# Allegro board METO_STM_CRY_V0_26.brd
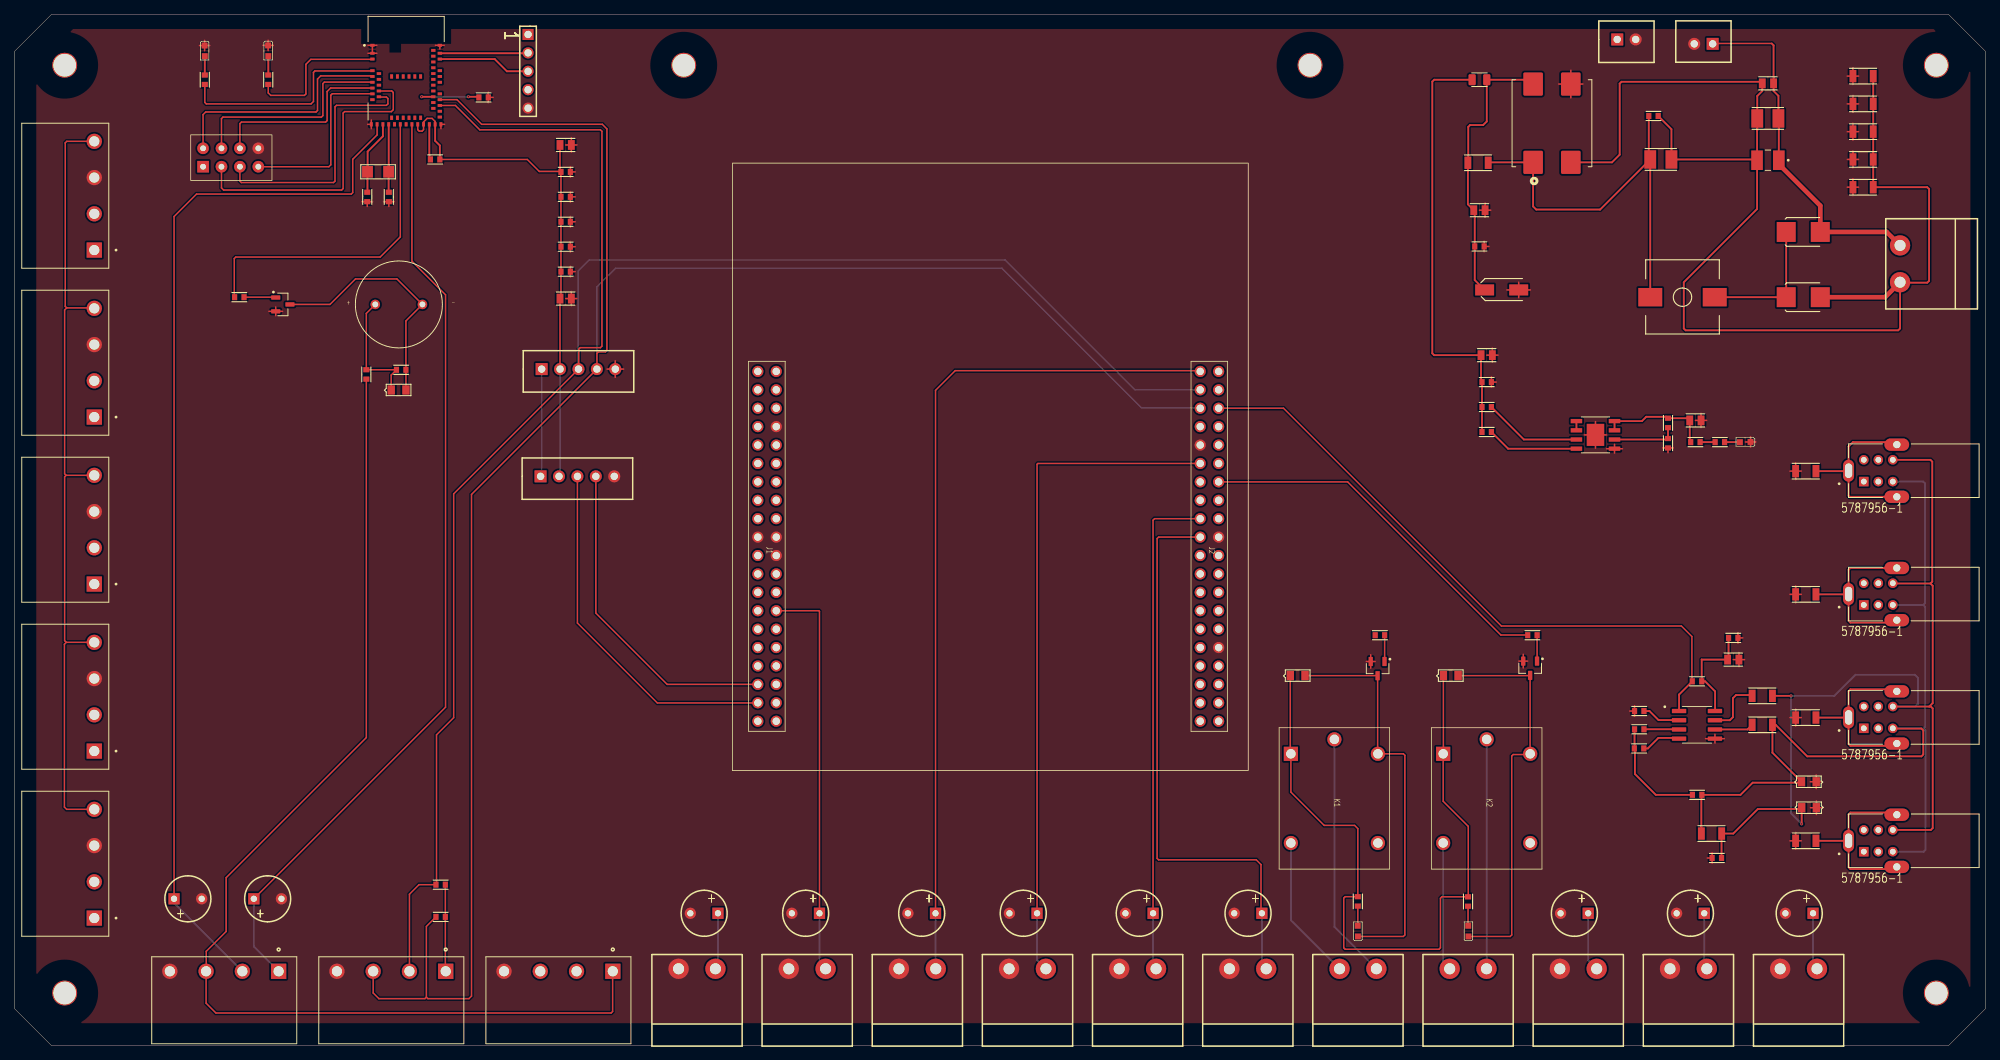
[diagram p0: board, top side]
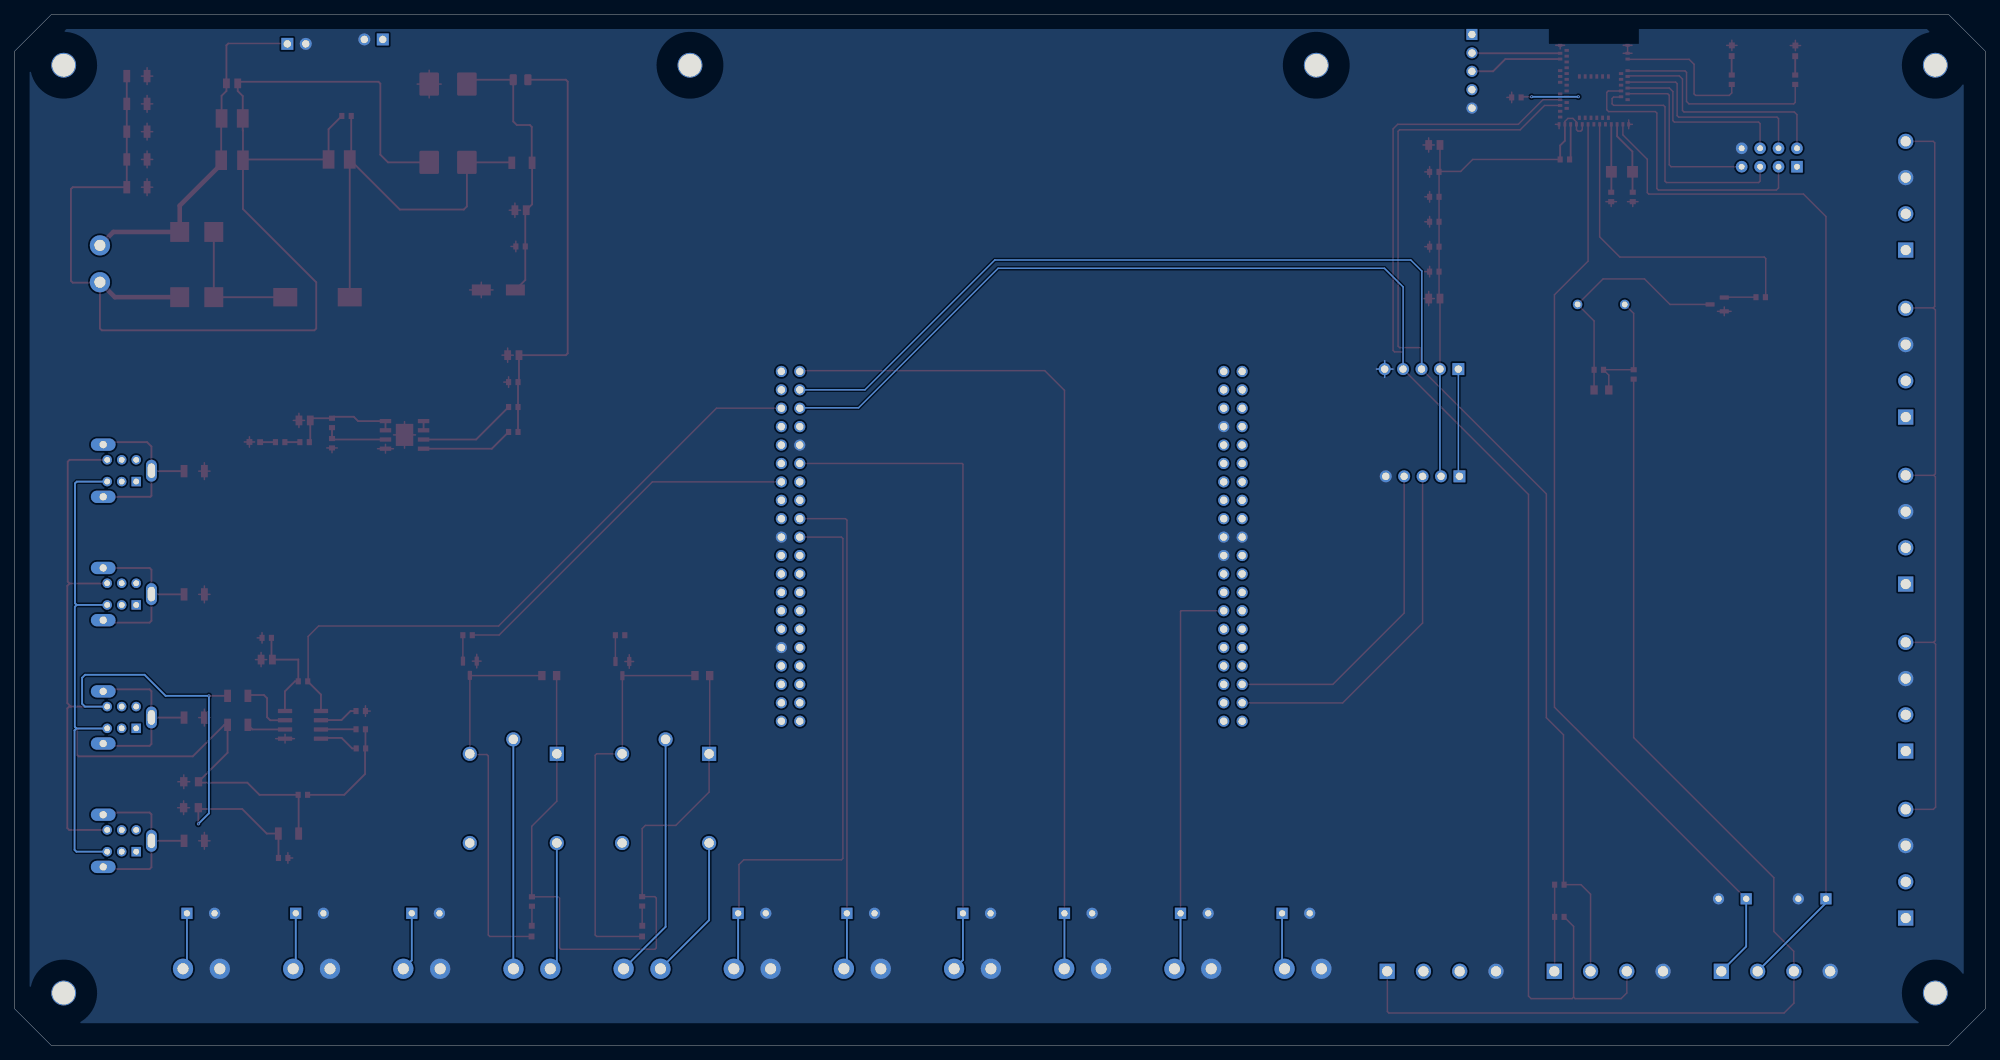
[diagram p1: board, bottom side, seen from below]

Outline 271.78 x 142.24 mm; copper layers: TOP, BOTTOM. Coordinates in mm from the lower left corner of the outline.
Outline path: 0,137.16 0,5.08 5.08,0 266.7,0 271.78,5.08 271.78,137.16 266.7,142.24 5.08,142.24 0,137.16

## Design rules (mm)
constraint set DEFAULT: min track width 0.203

## Placement (name value [footprint] x y rotation side)
C1  CAP POL  [CAPPOL2D250LS150034]  172 18.24 180 top
C2  CAP POL  [CAPPOL2D250LS150034]  217 18.24 180 top
C3  CAP POL  [CAPPOL2D250LS150034]  157 18.24 180 top
C4  CAP POL  [CAPPOL2D250LS150034]  141 18.24 180 top
C5  CAP POL  [CAPPOL2D250LS150034]  127 18.24 180 top
C6  CAP POL  [CAPPOL2D250LS150034]  111 18.24 180 top
C7  CAP POL  [CAPPOL2D250LS150034]  33 20.24 0 top
C8  CAP POL  [CAPPOL2D250LS150034]  97 18.24 180 top
C9  CAP POL  [CAPPOL2D250LS150034]  22 20.24 0 top
C10  CAP POL  [CAPPOL2D250LS150034]  233 18.24 180 top
C11  CAP POL  [CAPPOL2D250LS150034]  248 18.24 180 top
C12  10u/6V3/CER  [SMC0805]  237 53.24 0 top
C13  100n  [SMC0603]  237 56.24 0 top
C14  10u/6V3/CER  [SMC0805]  76 124.24 0 top
C15  100n  [SMC0603]  76 120.53 0 top
C16  100n  [SMC0603]  76 117.08 0 top
C17  100n  [SMC0603]  76 113.64 0 top
C18  100n  [SMC0603]  76 110.2 0 top
C19  100n  [SMC0603]  76 106.76 0 top
C20  10u/6V3/CER  [SMC0805]  76 103.05 0 top
C21  100n  [SMC0603]  64.68 130.8 0 top
C22  18p  [SMC0603]  48.64 117.07 90 top
C23  18p  [SMC0603]  51.61 117.07 90 top
C24  100n  [SMC0603]  202 110.24 0 top
C25  22uF/25V/LowESL  [SMC1210]  227 122.24 0 top
C26  100n  [SMC0603]  226 128.24 0 top
C27  10u/6V3/CER  [SMC0805]  202 115.24 0 top
C28  10u/6V3/CER  [SMC0805]  203 95.24 0 top
C29  100n  [SMC0603]  203 91.53 0 top
C30  10u/6V3/CER  [SMC0805]  231.78 86.24 0 top
C31  22uF/25VDV/Tantal  [CAP_6TPB33M]  241.78 122.14 180 top
C32  22uF/25V/LowESL  [SMC1210]  241.78 127.9 180 top
C33  10u/25V/CER  [SMC0805]  241.78 132.74 180 top
D1  1N4148WX  [SMDSOD323SD05T]  177.95 51.03 0 top
D2  1N4148WX  [SMDSOD323SD05T]  199.06 51.03 0 top
D3  SD12C  [SMDSOD323PESD5V]  248.44 36.39 0 top
D4  SD12C  [SMDSOD323PESD5V]  246.43 32.81 180 top
D5  1N4148WX  [SMDSOD323SD05T]  53.98 90.44 0 top
D6  LED-BLUE  [LED_0603]  35 137.24 90 top
D7  LED-RED  [LED_0603]  26.24 137.23 90 top
D8  MBRA340T3  [SMDO214AA21]  249 112.24 0 top
D9  MBRA340T3  [SMDO214AA21]  249 103.24 0 top
D10  SMAJ7A  [SMDO214AA21SMAJ33A]  205 104.24 0 top
D11  LED-GREEN  [LED_0603]  238.65 83.24 0 top
D12  LED-BLUE  [LED_0603]  185.22 15.78 270 top
D13  LED-BLUE  [LED_0603]  200.46 15.78 270 top
F1  0ZCK0100FF2E  [FUSC2113X180N]  202 133.24 180 top
FB1  MPZ1608S601A  [SMR0603]  231.78 83.24 0 top
FL1  ACM1211-102-2PL-TL01  [FIL_ACM1211-102-2PL-TL01]  212 127.24 90 top
J1  FH_2x20SG  [FH2X20SG]  102.5 93 270 top
J2  FH_2x20SG  [FH2X20SG]  163.5 93 270 top
J3  CON2  [2LI_KLEMENS_200MILS]  155.46 10.58 180 top
J4  CON2  [2LI_KLEMENS_200MILS]  170.64 10.58 180 top
J5  282811-4  [TE_282811-4]  11 117.24 90 top
J6  CON2  [2LI_KLEMENS_200MILS]  185.83 10.58 180 top
J7  CON2  [2LI_KLEMENS_200MILS]  201.02 10.58 180 top
J8  282811-4  [TE_282811-4]  11 94.2 90 top
J9  CON2  [2LI_KLEMENS_200MILS]  140.27 10.58 180 top
J10  282811-4  [TE_282811-4]  11 71.16 90 top
J11  282811-4  [TE_282811-4]  51.96 10.24 180 top
J12  CON2  [2LI_KLEMENS_200MILS]  125.08 10.58 180 top
J13  282811-4  [TE_282811-4]  11 48.12 90 top
J14  282811-4  [TE_282811-4]  75 10.24 180 top
J15  CON2  [2LI_KLEMENS_200MILS]  109.89 10.58 180 top
J16  282811-4  [TE_282811-4]  11 25.08 90 top
J17  CON2  [2LI_KLEMENS_200MILS]  94.7 10.58 180 top
J18  CON2  [2LI_KLEMENS_200MILS]  79.51 10.58 180 top
J19  CON2  [2LI_KLEMENS_200MILS]  260 93.24 270 top
J20  282811-4  [TE_282811-4]  28.92 10.24 180 top
J21  CON2  [2LI_KLEMENS_200MILS]  216.21 10.58 180 top
J22  CON2  [2LI_KLEMENS_200MILS]  231.4 10.58 180 top
J23  5787956-1  [TE_5787956-1]  257 79.3 0 top
J24  CON5  [CON5X140PROG]  70.82 139.49 270 top
J25  5787956-1  [TE_5787956-1]  257 62.28 0 top
J26  5787956-1  [TE_5787956-1]  257 45.26 0 top
J27  5787956-1  [TE_5787956-1]  257 28.24 0 top
J28  CON8  [HEADER_2_54MM_2X4]  26 121.24 0 top
J29  CON5  [CON5X140]  72.69 93.32 0 top
J30  CON5  [CON5X140]  72.54 78.52 0 top
J31  CON2  [CON2X140]  234.16 138.19 180 top
J32  CON2  [CON2X140]  221 138.8 0 top
K1  JQC-3F-_T73_-1Z-12VDC  [JQC3FT731Z12VDC]  176 40.24 270 top
K2  JQC-3F-_T73_-1Z-12VDC  [JQC3FT731Z12VDC]  197 40.24 270 top
L1  10uH  [SML0603]  58 122.24 0 top
L2  10u/SLF10145  [SLF10145NEW]  230 103.24 0 top
LS1  CCG-1206  [CUI_CCG-1206]  53 102.24 0 top
NOREF  -  [unnamed]  6.92 135.24 0 top
NOREF#2  -  [#2]  197 40.24 90 top
NOREF#3  -  [#2]  209 40.24 90 top
NOREF#4  -  [#2]  197 40.24 0 top
NOREF#5  -  [unnamed]  92.28 135.24 0 top
NOREF#6  -  [#2]  102.5 44.74 0 top
NOREF#7  -  [#2]  209 27.94 90 top
NOREF#8  -  [#2]  176 40.24 0 top
NOREF#9  -  [unnamed]  265 7.24 0 top
NOREF#10  -  [#2]  188 27.94 90 top
NOREF#11  -  [#2]  176 27.94 0 top
NOREF#12  -  [#2]  176 40.24 90 top
NOREF#13  -  [unnamed]  265 135.24 0 top
NOREF#14  -  [#2]  197 27.94 0 top
NOREF#15  -  [#2]  188 40.24 90 top
NOREF#16  -  [unnamed]  178.64 135.24 0 top
NOREF#17  -  [unnamed]  6.92 7.24 0 top
Q1  BC817  [SOT95P230X110-3N]  187.96 52 270 top
Q2  BC817  [SOT95P230X110-3N]  208.99 52.05 270 top
Q3  BC817  [SOT95P230X110-3N]  37 102.24 0 top
R1  1K  [SMR0603]  188.28 56.61 0 top
R2  1K  [SMR0603]  209.31 56.61 0 top
R3  10k  [SMR0603]  232.02 34.58 0 top
R4  10k  [SMR0603]  224.01 40.98 0 top
R5  10k  [SMR0603]  224.04 43.63 0 top
R6  10k  [SMR0603]  232 50.24 180 top
R7  10k  [SMR0603]  224.04 46.14 0 top
R8  100R  [SMR1206]  241 44.24 180 top
R9  120R  [SMR1206]  234 29.24 0 top
R10  100R  [SMR1206]  241 48.24 180 top
R11  100R  [SMR1206]  247 79.24 0 top
R12  10k  [SMR0603]  234.73 25.87 180 top
R13  33R  [SMR0603]  48.51 92.58 270 top
R14  1K  [SMR0603]  53.32 93.22 180 top
R15  180R  [SMR0603]  31 103.24 0 top
R16  470R  [SMR0603]  34.99 133.24 90 top
R17  470R  [SMR0603]  26.24 133.24 90 top
R18  OR  [SMR1206]  201.81 121.78 180 top
R19  0R  [SMR1206]  254.9 118.41 180 top
R20  0R  [SMR1206]  254.9 122.24 180 top
R21  0R  [SMR1206]  254.9 126.08 180 top
R22  0R  [SMR1206]  254.9 129.91 180 top
R23  0R  [SMR1206]  254.9 133.74 180 top
R24  100k  [SMR0603]  203 88.08 0 top
R25  6k8  [SMR0603]  228 85.89 270 top
R26  100k  [SMR0603]  203 84.64 0 top
R27  470R  [SMR0603]  235.15 83.24 0 top
R28  2k2  [SMR0603]  228 83.09 270 top
R29  100R  [SMR1206]  247 62.24 0 top
R30  100R  [SMR1206]  247 45.24 0 top
R31  100R  [SMR1206]  247 28.24 0 top
R32  470R  [SMR0603]  185.23 19.88 270 top
R33  470R  [SMR0603]  200.43 19.87 270 top
R34  1K5  [SMR0603]  58.76 17.74 180 top
R35  1K5  [SMR0603]  58.76 22.19 180 top
U1  MAX485ESA+  [SOIC127P600X175-8N]  232 44.24 0 top
U2  MDBT50Q-1MV2  [XCVR_MDBT50Q-1MV2]  54 134.24 0 top
U3  AP7165-SPG-13  [SOIC127P600X163-9N]  218 84.24 0 top
Y1  CM315D32768DZFT  [XTAL_CM315_SMD]  50.13 120.54 180 top

## Library data of the parts
C1-C11 = CAP POL
C12-C23 C28-C30 = CAPACITOR NON-POL
C24-C27 = CAPACITOR NON-POL: room: Vdd5V
C31 = 6TPB33M: room: PowerIn
C32 C33 = CAPACITOR NON-POL: room: PowerIn
D1 D2 D5 = DIODE ZENER: room: Buzzer
D3 D4 = DIODE TVS BI-DIR: room: rs232
D6 D7 D11-D13 = LED
D8 = 1N5819M/CYL
D9 = 1N5819M/CYL: room: Vdd5V
D10 = DIODE TVS: room: Vdd5V
F1 = 0ZCK0100FF2E: room: usb2
FB1 = INDUCTOR/SM
FL1 = ACM1211-102-2PL-TL01: room: Vdd5V
J1 J2 = FH_2x20SG
J3 J4 J6 J7 J9 J12 J15 J17-J19 J21 J22 J31 J32 = CON2
J5 J8 J10 J11 J13 J14 J16 J20 = 282811-4
J23 J25-J27 = 5787956-1
J24 J29 J30 = CON5
J28 = CON8
K1 K2 = JQC-3F-_T73_2
L1 = INDUCTOR
L2 = INDUCTOR/SM: room: Vdd5V
LS1 = CCG-1206: room: Buzzer
Q1-Q3 = BC817: room: Buzzer
R1 R2 R11 R13-R15 R29-R31 = RESISTOR/SM_0: room: Buzzer
R3-R10 R12 R25 R28 = RESISTOR/SM_0
R16 R17 R24 R26 R27 R32-R35 = RESISTOR
R18 = RESISTOR/SM_0: room: Vdd5V
R19-R23 = RESISTOR: room: GndMatch
U1 = MAX485ESA+
U2 = MDBT50Q-1MV2_0
U3 = AP7165-SPG-13_0
Y1 = CRYSTAL/SM

## Footprints (pads in the part's own frame, mm; a bottom-side part is the same pattern mirrored in y, then rotated)
2LI_KLEMENS_200MILS
  round 2.794 hole 1.524: 1(-17.145,0) 2(-12.065,0)
CAP_6TPB33M
  rect 1.6x2.7 smd: 1(-1.5,0) 2(1.5,0)
CAPPOL2D250LS150034
  rect 1.549x1.549 hole 0.864: 1(0,0)
  round 1.549 hole 0.864: 2(3.81,0)
CON2X140
  rect 1.651x1.651 hole 1.016: 1(0,0)
  round 1.651 hole 1.016: 2(2.54,0)
CON5X140
  rect 1.651x1.651 hole 1.016: 1(0,0)
  round 1.651 hole 1.016: 2(2.54,0) 3(5.08,0) 4(7.62,0) 5(10.16,0)
CON5X140PROG
  rect 1.524x1.524 hole 1.016: 1(0,0)
  round 1.524 hole 1.016: 2(2.54,0) 3(5.08,0) 4(7.62,0) 5(10.16,0)
CUI_CCG-1206
  round 1.308 hole 0.8: M(3.25,0) P(-3.25,0)
FH2X20SG
  round 1.53 hole 1.02: 1(0,0) 2(0,2.54) 3(2.54,0) 4(2.54,2.54) 5(5.08,0) 6(5.08,2.54) 7(7.62,0) 8(7.62,2.54) 9(10.16,0) 10(10.16,2.54) 11(12.7,0) 12(12.7,2.54) 13(15.24,0) 14(15.24,2.54) 15(17.78,0) 16(17.78,2.54) 17(20.32,0) 18(20.32,2.54) 19(22.86,0) 20(22.86,2.54) 21(25.4,0) 22(25.4,2.54) 23(27.94,0) 24(27.94,2.54) 25(30.48,0) 26(30.48,2.54) 27(33.02,0) 28(33.02,2.54) 29(35.56,0) 30(35.56,2.54) 31(38.1,0) 32(38.1,2.54) 33(40.64,0) 34(40.64,2.54) 35(43.18,0) 36(43.18,2.54) 37(45.72,0) 38(45.72,2.54) 39(48.26,0) 40(48.26,2.54)
FIL_ACM1211-102-2PL-TL01
  custom 3.2x2.7 smd: 1(-5.4,2.6) 2(-5.4,-2.6) 3(5.4,-2.6) 4(5.4,2.6)
FUSC2113X180N
  custom 1x1.52 smd: 1(-1.01,0) 2(1.01,0)
HEADER_2_54MM_2X4
  rect 1.6x1.6 hole 0.8: 1(0,0)
  round 1.6 hole 0.8: 2(2.54,0) 3(5.08,0) 4(7.62,0) 5(0,2.54) 6(2.54,2.54) 7(5.08,2.54) 8(7.62,2.54)
JQC3FT731Z12VDC
  rect 1.95x1.95 hole 1.3: 1(0,0)
  round 1.95 hole 1.3: 2(12.3,0) 3(12.3,12) 4(0,12) 5(-2,6)
LED_0603
  rect 0.813x0.813 smd: 1(-0.737,0) 2(0.737,0.025)
SLF10145NEW
  rect 3.302x2.54 smd: 1(-4.445,0) 2(4.445,0)
SMC0603
  rect 0.711x0.838 smd: 1(-0.65,0) 2(0.65,0)
SMC0805
  rect 0.94x1.346 smd: 1(-0.78,0) 2(0.78,0)
SMC1210
  rect 1.626x2.54 smd: 1(-1.448,0) 2(1.473,0)
SMDO214AA21
  rect 2.616x2.743 smd: 1(0,0) 2(-4.699,0)
SMDO214AA21SMAJ33A
  rect 2.616x1.524 smd: 1(2.413,0) 2(-2.286,0)
SMDSOD323PESD5V
  rect 1.016x1.27 smd: 1(0,0) 2(-2.032,0)
SMDSOD323SD05T
  rect 1.016x1.27 smd: 1(0,0) 2(-2.032,0)
SML0603
  rect 0.711x0.838 smd: 1(-0.65,0) 2(0.65,0)
SMR0603
  rect 0.711x0.838 smd: 1(-0.65,0) 2(0.65,0)
SMR1206
  rect 0.94x1.702 smd: 1(-1.4,0) 2(1.4,0)
SOIC127P600X163-9N
  rect 1.58x0.59 smd: 1(-2.625,1.905) 2(-2.625,0.635) 3(-2.625,-0.635) 4(-2.625,-1.905) 5(2.625,-1.905) 6(2.625,-0.635) 7(2.625,0.635) 8(2.625,1.905)
  rect 2.41x3.05 smd: 9(0,0)
SOIC127P600X175-8N
  custom 1.97x0.59 smd: 1(-2.475,1.905) 2(-2.475,0.635) 3(-2.475,-0.635) 4(-2.475,-1.905) 5(2.475,-1.905) 6(2.475,-0.635) 7(2.475,0.635) 8(2.475,1.905)
SOT95P230X110-3N
  custom 1.26x0.59 smd: 1(-0.98,0.95) 2(-0.98,-0.95) 3(0.98,0)
TE_282811-4
  rect 2.1x2.1 hole 1.4: 1(-7.5,0)
  round 2.1 hole 1.4: 2(-2.5,0) 3(2.5,0) 4(7.5,0)
TE_5787956-1
  rect 1.308x1.308 hole 0.8: 1(-2,-1.5)
  round 1.308 hole 0.8: 2(-2,1.5) 3(0,-1.5) 4(0,1.5) 5(2,-1.5) 6(2,1.5)
  oval 1.508x3.016 hole 1x2: S1(-4.1,0)
  oval 3.4x1.7 hole 1: S2(2.55,3.6) S3(2.55,-3.6)
unnamed
  round 3.429 hole 3.124: (0,0)
XCVR_MDBT50Q-1MV2
  rect 0.6x0.4 smd: 1(-4.65,3.75) 2(-4.65,2.65) 3(-4.65,1.85) 4(-4.65,0.25) 5(-3.75,-0.15) 6(-4.65,-0.55) 7(-3.75,-0.95) 8(-4.65,-1.35) 9(-3.75,-1.75) 10(-4.65,-2.15) 11(-3.75,-2.55) 12(-4.65,-2.95) 13(-3.75,-3.35) 14(-4.65,-3.75) 34(4.65,-6.15) 35(4.65,-5.35) 36(3.75,-4.95) 37(4.65,-4.55) 38(3.75,-4.15) 39(4.65,-3.75) 40(3.75,-3.35) 41(4.65,-2.95) 42(3.75,-2.55) 43(3.75,-1.75) 44(4.65,-1.35) 45(3.75,-0.95) 46(4.65,-0.55) 47(3.75,-0.15) 48(4.65,0.25) 49(3.75,0.65) 50(3.75,1.45) 51(4.65,1.85) 52(3.75,2.25) 53(4.65,2.65) 54(3.75,3.05) 55(4.65,3.75)
  rect 0.4x0.6 smd: 15(-4.8,-7.15) 16(-4,-7.15) 17(-3.2,-7.15) 18(-2.4,-7.15) 19(-2,-6.25) 20(-1.6,-7.15) 21(-1.2,-6.25) 22(-0.8,-7.15) 23(-0.4,-6.25) 24(0,-7.15) 25(0.4,-6.25) 26(0.8,-7.15) 27(1.2,-6.25) 28(1.6,-7.15) 29(2,-6.25) 30(2.4,-7.15) 31(3.2,-7.15) 32(4,-7.15) 33(4.8,-7.15) 56(-2,-0.55) 57(-1.2,-0.55) 58(-0.4,-0.55) 59(0.4,-0.55) 60(1.2,-0.55) 61(2,-0.55)
XTAL_CM315_SMD
  rect 1.499x1.6 smd: 1(-1.453,0) 2(1.463,0)

## Nets
3.3V: C14.1 C15.1 C16.1 C17.1 C18.1 C19.1 C20.1 FB1.2 J11.1 J24.1 J28.1 J29.2 J30.2 J32.1 L1.2 R27.1 R34.1 R35.1 U2.28 U2.30(VDDH) U2.32
GND: C1.2 C2.2 C3.2 C4.2 C5.2 C6.2 C7.2 C8.2 C9.2 C10.2 C11.2 C12.2 C13.2 C14.2 C15.2 C16.2 C17.2 C18.2 C19.2 C20.2 C21.2 C22.1 C23.1 C24.2 C27.2 C28.2 C29.2 C30.2 D3.1 D4.2 D6.2(CATHODE) D7.2(CATHODE) D10.1 D11.2(CATHODE) FL1.3 J1.8 J1.19 J1.20 J1.22 J2.9 J2.20 J2.32 J3.2 J5.3 J7.2 J8.3 J9.2 J10.3 J11.4 J12.2 J13.3 J14.4 J15.2 J16.3 J17.2 J18.2 J20.4 J21.2 J22.2 J24.5 J28.8 J29.5 J30.5 J31.2 J32.2 Q1.2(E) Q2.2(E) Q3.2(E) R7.1 R11.1 R12.2 R19.2 R20.2 R21.2 R22.2 R23.2 R28.2 R29.1 R30.1 R31.1 U1.5 U2.1 U2.2 U2.15 U2.33 U2.55 U3.5 U3.9
VDD5VIN: C12.1 C13.1 C28.1 C29.1 D1.2(CATHODE) D2.2(CATHODE) F1.2 J14.1 J20.3 K1.1 K2.1 R3.1 R4.1 R5.1 R6.1 R13.2 R24.1 R26.1 R32.1 R33.1 U1.8(VCC) U3.1 U3.2
485_A: D3.2 J23.5 J25.5 J26.5 J27.5 R3.2 R8.1 R9.1
485_B: D4.1 J23.6 J25.6 J26.6 J27.6 R9.2 R10.1 R12.1
BL_EX_PIN_1: J28.2 U2.11
BL_EX_PIN_2: J28.3 U2.13
BL_EX_PIN_3: J28.4 U2.12
BL_EX_PIN_4: J28.5 U2.6
BL_EX_PIN_5: J28.6 U2.8
BL_EX_PIN_6: J28.7 U2.10
BUZZER: R15.1 U2.22
CON_A_PIN_1: J1.1
CON_A_PIN_2: J1.2
CON_A_PIN_3: J1.3
CON_A_PIN_4: C11.1 J1.4 J22.1
CON_A_PIN_5: J1.5
CON_A_PIN_6: J1.6
CON_A_PIN_7: J1.7
CON_A_PIN_9: J1.9
CON_A_PIN_10: J1.10
CON_A_PIN_11: J1.11
CON_A_PIN_12: J1.12
CON_A_PIN_13: J1.13
CON_A_PIN_14: J1.14
CON_A_PIN_15: J1.15
CON_A_PIN_16: J1.16
CON_A_PIN_17: J1.17
CON_A_PIN_18: J1.18
CON_A_PIN_21: J1.21
CON_A_PIN_23: J1.23
CON_A_PIN_24: J1.24
CON_A_PIN_25: J1.25
CON_A_PIN_26: J1.26
CON_A_PIN_27: J1.27
CON_A_PIN_28: C6.1 J1.28 J17.1
CON_A_PIN_29: J1.29
CON_A_PIN_30: J1.30
CON_A_PIN_31: J1.31
CON_A_PIN_32: C10.1 J1.32 J21.1
CON_A_PIN_33: J1.33
CON_A_PIN_34: J1.34 J13.1
CON_A_PIN_35: J1.35 J30.4
CON_A_PIN_36: J1.36 J16.1
CON_A_PIN_37: J1.37 J30.3
CON_A_PIN_38: J1.38 R1.1
CON_A_PIN_39: J1.39
CON_A_PIN_40: J1.40
CON_B_PIN_1: C5.1 J2.1 J15.1
CON_B_PIN_2: C2.1 J2.2 J7.1
CON_B_PIN_3: J2.3 J11.2 J29.3 R35.2 U2.37
CON_B_PIN_4: J2.4
CON_B_PIN_5: J2.5 J11.3 J29.4 R34.2 U2.39
CON_B_PIN_6: J2.6 J14.2 R6.2 U1.1
CON_B_PIN_7: J2.7
CON_B_PIN_8: J2.8
CON_B_PIN_10: J2.10
CON_B_PIN_11: C4.1 J2.11 J12.1
CON_B_PIN_12: J2.12
CON_B_PIN_13: J2.13
CON_B_PIN_14: J2.14 R2.1
CON_B_PIN_15: J2.15
CON_B_PIN_16: J2.16
CON_B_PIN_17: C3.1 J2.17 J9.1
CON_B_PIN_18: C8.1 J2.18 J18.1
CON_B_PIN_19: C1.1 J2.19 J3.1
CON_B_PIN_21: J2.21 J5.4 J8.4 J10.4 J13.4 J16.4
CON_B_PIN_22: J2.22 J16.2
CON_B_PIN_23: J2.23 J10.2
CON_B_PIN_24: J2.24 J13.2
CON_B_PIN_25: J2.25 J8.2
CON_B_PIN_26: J2.26
CON_B_PIN_27: J2.27 J5.2
CON_B_PIN_28: J2.28
CON_B_PIN_29: J2.29 J10.1
CON_B_PIN_30: J2.30
CON_B_PIN_31: J2.31 J8.1
CON_B_PIN_33: J2.33 J5.1
CON_B_PIN_34: J2.34 J14.3 R4.2 U1.4
CON_B_PIN_35: J2.35
CON_B_PIN_36: J2.36
CON_B_PIN_37: J2.37
CON_B_PIN_38: J2.38
CON_B_PIN_39: J2.39
CON_B_PIN_40: J2.40
DBG_LED_1: R16.1 U2.3
DBG_LED_2: R17.1 U2.4
ENCODER_A: C7.1 J20.1 U2.26
ENCODER_B: C9.1 J20.2 U2.16
FGND: C25.2 C26.2 C31.2 C32.2 C33.2 D9.1 FL1.2 J19.2 R19.1 R20.1 R21.1 R22.1 R23.1
NRESET: C21.1 U2.40
RELAY1_1: J4.1 K1.5
RELAY1_2: J4.2 K1.2
RELAY2_1: J6.1 K2.5
RELAY2_2: J6.2 K2.2
SWCLK: J24.2 U2.53
SWDIO: J24.3 U2.51
UC_OSC_IN: C22.2 U2.17 Y1.2
UC_OSC_OUT: C23.2 U2.18 Y1.1
VDC_5V: C31.1 C32.1 C33.1 D8.1 J19.1 J29.1 J30.1 J31.1
N8883662: D5.1 LS1.M Q3.3 R14.1
N8883700: D5.2(CATHODE) LS1.P R13.1 R14.2
N9062725: L1.1 U2.31
N9076286: D8.2(CATHODE) D9.2(CATHODE) L2.2
N9076290: C25.1 C26.1 FL1.1 L2.1 R18.1
N9076304: C24.1 C27.1 D10.2(CATHODE) F1.1 FL1.4 R18.2
N9079599: C30.1 FB1.1 R25.1 U3.7 U3.8
N9079749: R24.2 U3.3(POK)
N9079753: R25.2 R28.1 U3.6
N9079813: R26.2 U3.4
N9092651: D1.1 D12.2(CATHODE) K1.4 Q1.3
N9092718: Q1.1 R1.2
N9093131: D2.1 D13.2(CATHODE) K2.4 Q2.3
N9093215: Q2.1 R2.2
N9096482: R7.2 U1.2
N9096486: R5.2 U1.3
N9096991: R8.2 U1.6
N9096995: R10.2 U1.7
N9098499: J23.S1 J23.S2 J23.S3(SHIELD__2) R11.2
N9104799: J25.S1 J25.S2 J25.S3(SHIELD__2) R29.2
N9105165: J26.S1 J26.S2 J26.S3(SHIELD__2) R30.2
N9105269: J27.S1 J27.S2 J27.S3(SHIELD__2) R31.2
N9107937: D12.1 R32.2
N9108044: D13.1 R33.2
N90510690: Q3.1 R15.2
N90714391: D6.1 R16.2
N90750741: D7.1 R17.2
N90797911: D11.1 R27.2

Pads without a net: J23 1 2 3 4; J24 4; J25 1 2 3 4; J26 1 2 3 4; J27 1 2 3 4; K1 3; K2 3; U2 5 7 9 14 19 20 21 23 24 25 27 29 34 35 36 38 41 42 43 44 45 46 47 48 49 50 52 54 56 57 58 59 60 61

## Via types
v1: diameter 0.406, hole 0.203, TOP to BOTTOM, 4 vias

## Routing (per net, layer and track width the routed paths; a pad name or vN(x,y) marks a point on that pad's centre or on a via; arc(x,y) is an arc through that point)
3.3V: length 87.5
  TOP w0.203: R35.1 R34.1 59.41,10.29 J11.1 ; L1.2 70.71,122.24 72.36,120.59 75.29,120.59 ; 75.29,120.59 75.22,120.66 C14.1 ; 75.29,120.59 C15.1 C16.1 C17.1 C18.1 C19.1 75.35,103.18 C20.1 75.22,93.33 J29.2 ; U2.32 58,127.49 57.58,127.9 56.9,127.9 56.4,127.41 U2.30 56.4,126.35 56.2,126.15 55.8,126.15 55.6,126.35 U2.28
  TOP w0.254: L1.2 58.65,124.17 58,124.82 U2.32 ; FB1.2 R27.1
  BOTTOM w0.203: J29.2 75.23,78.67 J30.2
GND: length 153.4
  TOP w0.203: 202.78,114.26 C27.2 ; C27.2 203.55,115.24 ; C27.2 202,115.24 ; C27.2 202.78,116.22 ; 76.01,103.05 C20.2 ; C20.2 77.55,103.05 ; C20.2 76.78,102.07 ; C20.2 76.78,104.03 ; D11.2 239.39,83.98 ; D11.2 240.1,83.27 ; D11.2 238.67,83.27 ; D11.2 239.39,82.55 ; 244.82,79.24 R11.1 ; R11.1 245.6,78.08 ; R11.1 246.37,79.24 ; R11.1 245.6,80.4 ; 253.5,128.75 R22.2 ; R22.2 252.72,129.91 ; R22.2 254.27,129.91 ; R22.2 253.5,131.06 ; U3.9 219.51,84.24 ; U3.9 218,86.07 ; U3.9 218,82.41 ; U3.9 216.49,84.24 ; D7.2 26.92,137.96 ; D7.2 26.21,138.67 ; D7.2 25.5,137.96 ; D7.2 26.21,137.25 ; 82.85,92.19 J29.5 ; J29.5 82.85,94.45 ; J29.5 81.72,93.32 ; J29.5 83.98,93.32 ; D6.2 35.69,137.98 ; D6.2 34.97,138.69 ; D6.2 34.97,137.27 ; D6.2 34.26,137.98 ; D3.1 249.25,36.39 ; D3.1 247.62,36.39 ; D3.1 248.44,35.45 ; D3.1 248.44,37.33 ; C17.2 77.31,113.64 ; C17.2 76.65,112.92 ; C17.2 76.65,114.37 ; 50.89,116.42 C23.1 ; C23.1 52.34,116.42 ; C23.1 51.61,115.76 ; C15.2 77.31,120.53 ; C15.2 76.65,119.8 ; C15.2 76.65,121.25 ; FL1.3 214.6,134.54 ; FL1.3 216.25,132.64 ; FL1.3 212.94,132.64 ; FL1.3 214.6,130.74 ; C16.2 76.65,117.81 ; C16.2 77.31,117.08 ; C16.2 76.65,116.36 ; 252.72,126.08 R21.2 ; R21.2 253.5,124.92 ; R21.2 254.27,126.08 ; R21.2 253.5,127.23 ; Q3.2 36.95,101.29 ; Q3.2 36.02,100.69 ; Q3.2 35.09,101.29 ; Q3.2 36.02,101.89 ; R19.2 254.27,118.41 ; R19.2 253.5,117.26 ; R19.2 252.72,118.41 ; R19.2 253.5,119.57 ; C30.2 232.56,87.22 ; C30.2 233.33,86.24 ; C30.2 232.56,85.26 ; C30.2 231.78,86.24 ; 227.28,82.44 R28.2 ; R28.2 228,81.78 ; R28.2 228.72,82.44 ; 245.6,44.08 R30.1 ; R30.1 245.6,46.4 ; R30.1 246.37,45.24 ; R30.1 244.82,45.24 ; 48.75,136.89 U2.2 ; U2.2 49.35,137.39 ; U2.2 49.95,136.89 ; C19.2 77.31,106.76 ; C19.2 76.65,107.49 ; C19.2 76.65,106.04 ; 207.44,53.03 Q2.2 ; Q2.2 208.04,52.09 ; Q2.2 208.64,53.03 ; Q2.2 208.04,53.96 ; 202.65,109.52 C24.2 ; C24.2 203.31,110.24 ; C24.2 202.65,110.96 ; C12.2 238.55,53.24 ; C12.2 237.78,54.22 ; C12.2 237.78,52.26 ; C12.2 237,53.24 ; 203.78,94.26 C28.2 ; C28.2 203,95.24 ; C28.2 204.55,95.24 ; C28.2 203.78,96.22 ; 245.6,27.08 R31.1 ; R31.1 246.37,28.24 ; R31.1 244.82,28.24 ; R31.1 245.6,29.4 ; U1.5 234.47,42.94 ; U1.5 233.18,42.34 ; U1.5 235.76,42.34 ; U1.5 234.47,41.74 ; R23.2 253.5,134.9 ; R23.2 252.72,133.74 ; R23.2 253.5,132.58 ; R23.2 254.27,133.74 ; C13.2 237.65,56.96 ; C13.2 238.31,56.24 ; C13.2 237.65,55.52 ; 252.72,122.24 R20.2 ; R20.2 254.27,122.24 ; R20.2 253.5,123.4 ; R20.2 253.5,121.09 ; U3.5 220.62,82.93 ; U3.5 221.72,82.34 ; U3.5 219.53,82.34 ; U3.5 220.62,81.74 ; 58.05,137.99 U2.55 ; U2.55 59.25,137.99 ; U2.55 58.65,137.49 ; C22.1 49.36,116.42 ; C22.1 48.64,115.76 ; C22.1 47.92,116.42 ; 244.82,62.24 R29.1 ; R29.1 246.37,62.24 ; R29.1 245.6,61.08 ; R29.1 245.6,63.4 ; C29.2 204.31,91.53 ; C29.2 203.65,92.25 ; C29.2 203.65,90.8 ; 248.46,31.87 D4.2 ; D4.2 248.46,33.75 ; D4.2 247.65,32.81 ; D4.2 249.28,32.81 ; U2.15 49.2,127.69 ; U2.15 49.2,126.49 ; U2.15 48.7,127.09 ; 222.73,46.14 R7.1 ; R7.1 223.39,46.86 ; R7.1 223.39,45.42 ; 58.8,126.49 U2.33 59.3,127.09 ; 49.35,137.49 U2.1 ; U2.1 48.75,137.99 ; U2.1 49.95,137.99 ; R12.2 234.08,26.6 ; R12.2 233.42,25.87 ; R12.2 234.08,25.15 ; Q1.2 187.01,53.91 ; Q1.2 187.01,52.04 ; Q1.2 186.41,52.98 ; Q1.2 187.61,52.98 ; 205.8,104.24 D10.1 ; D10.1 207.41,103.17 ; D10.1 209.03,104.24 ; D10.1 207.41,105.31 ; 76.65,109.48 C18.2 ; C18.2 76.65,110.93 ; C18.2 77.31,110.2 ; C14.2 77.55,124.24 ; C14.2 76.78,125.22 ; C14.2 76.01,124.24 ; C14.2 76.78,123.26 ; C21.2 65.99,130.8 ; C21.2 65.33,131.52 ; C21.2 65.33,130.08
  BOTTOM w0.203: 82.85,92.19 J29.5 ; J29.5 81.72,93.32 ; J29.5 82.85,94.45 ; J29.5 83.98,93.32
VDD5VIN: length 351.3
  TOP w0.203: D2.2 197.03,40.27 K2.1 197,33.7 200.46,30.24 200.46,20.54 R33.1 196.82,20.52 196.62,20.31 196.62,13.48 196.42,13.27 183.49,13.27 183.29,13.48 183.29,20.33 183.49,20.53 R32.1 185.23,29.92 184.78,30.37 180.59,30.37 176,34.96 K1.1 175.92,40.32 D1.2 ; J14.1 82.47,10.21 82.47,4.69 82.27,4.48 27.77,4.48 26.42,5.83 J20.3 26.44,10.26 26.44,12.99 29.18,15.74 29.18,23.15 48.51,42.48 R13.2
  TOP w0.254: R26.1 R24.1 C29.1 202.22,91.66 C28.1 195.75,95.24 195.5,95.49 195.5,132.99 195.75,133.24 F1.2 ; U3.1 U3.2 ; C13.1 236.35,53.37 C12.1 232.65,53.24 232.65,53.24 R6.1 233.11,50.24 234.49,48.86 234.49,46.16 U1.8 ; R3.1 226.31,34.58 223.44,37.45 223.44,40.9 R4.1 223.39,41.01 R5.1
485_A: length 128.3
  TOP w0.254: R9.1 232.6,34.51 R3.2 238,34.58 239.67,36.26 246.28,36.26 D3.2 242.4,40.39 R8.1 242.85,44.24 247.19,39.89 262.94,39.89 263.19,40.15 263.19,43.47 262.94,43.73 259.03,43.73 J26.5
  BOTTOM w0.254: J23.5 263.19,77.8 263.44,77.55 263.44,61.01 263.21,60.78 ; 263.21,60.78 263.46,60.53 263.46,43.95 263.25,43.74 ; 263.21,60.78 J25.5 ; 263.25,43.74 259.02,43.74 J26.5 ; 263.25,43.74 263.5,43.49 263.5,26.99 263.25,26.74 J27.5
485_B: length 137.7
  TOP w0.254: 264.19,63.74 264.5,63.43 264.5,47.24 264.02,46.76 ; 264.19,63.74 264.44,63.99 264.44,80.55 264.19,80.8 J23.6 ; 264.19,63.74 259.04,63.74 J25.6 ; 264.02,46.76 J26.6 ; 264.02,46.76 264.25,46.76 264.5,46.51 264.5,29.99 264.25,29.74 J27.6 ; R12.1 235.38,29.22 R9.2 237,29.24 240.39,32.63 246.25,32.63 D4.1 v1(246.43,30.57) ; R10.1 v1(244.97,48.24)
  BOTTOM w0.254: v1(246.43,30.57) 244.97,32.03 v1(244.97,48.24) 250.94,48.24 253.85,51.14 262.05,51.14 262.46,50.74 262.46,47.16 262.05,46.75 259.01,46.75 J26.6
BL_EX_PIN_1: length 41.9
  TOP w0.203: U2.11 50.25,131.69 52.02,131.69 52.22,131.48 52.22,129.1 51.97,128.84 45.52,128.84 45.31,128.64 45.31,118.23 45.11,118.02 28.83,118.02 28.54,118.31 J28.2
BL_EX_PIN_2: length 35
  TOP w0.203: U2.13 50.29,130.85 51.28,130.85 51.49,130.65 51.49,129.91 51.28,129.71 44.4,129.71 44.2,129.5 44.2,119.26 43.99,119.05 31.28,119.05 31.08,119.26 J28.3
BL_EX_PIN_3: length 25.5
  TOP w0.203: U2.12 49.33,131.31 43.81,131.31 43.61,131.1 43.61,121.5 43.35,121.24 J28.4
BL_EX_PIN_4: length 32.8
  TOP w0.203: J28.5 26,128.43 26.37,128.79 41.58,128.79 41.78,129 41.78,133.34 42.21,133.77 49.27,133.77 U2.6
BL_EX_PIN_5: length 29.6
  TOP w0.203: J28.6 28.54,127.88 28.74,128.08 42.32,128.08 42.52,128.28 42.52,132.7 42.72,132.91 49.33,132.91 U2.8
BL_EX_PIN_6: length 26.1
  TOP w0.203: J28.7 31.08,127.18 31.29,127.4 42.9,127.4 43.1,127.6 43.1,131.61 43.59,132.09 49.35,132.09 U2.10
BUZZER: length 45
  TOP w0.203: U2.22 53.2,111.56 50.42,108.78 30.51,108.78 30.3,108.57 30.3,103.29 R15.1
CON_A_PIN_4: length 7.9
  BOTTOM w0.254: C11.1 248,11.13 J22.1
CON_A_PIN_28: length 55.7
  TOP w0.203: J1.28 110.92,59.98 111,59.9 C6.1
  BOTTOM w0.254: J17.1 111,11.43 C6.1
CON_A_PIN_32: length 7.8
  BOTTOM w0.254: J21.1 233,10.94 C10.1
CON_A_PIN_35: length 45.3
  TOP w0.203: J1.35 102.5,49.82 89.99,49.82 80.16,59.66 J30.4
CON_A_PIN_37: length 49.7
  TOP w0.203: J1.37 102.48,47.26 88.65,47.26 77.62,58.28 J30.3
CON_B_PIN_1: length 117.5
  TOP w0.203: J2.1 163.39,93.11 129.72,93.11 127,90.39 C5.1
  BOTTOM w0.254: J15.1 127,10.62 C5.1
CON_B_PIN_2: length 8.1
  BOTTOM w0.254: C2.1 217,11.75 J7.1
CON_B_PIN_3: length 261.1
  TOP w0.203: J11.2 54.46,20.87 55.78,22.19 R35.2 58.19,22.27 58.19,42.86 60.55,45.23 60.55,76.11 J29.3 77.8,93.35 77.8,96.08 78,96.28 80.8,96.28 81,96.48 81,126.13 80.8,126.33 64.16,126.33 60.8,129.69 U2.37
  BOTTOM w0.203: J2.3 154.51,90.46 136.6,108.37 79.25,108.37 77.72,106.85 77.72,93.36 J29.3
CON_B_PIN_5: length 285
  TOP w0.203: 56.79,6.67 57,6.47 62.66,6.47 63.02,6.82 63.02,76.03 J29.4 80.31,95.49 80.51,95.7 81.48,95.7 81.69,95.9 81.69,126.46 81.05,127.09 64.41,127.09 61.01,130.49 58.65,130.49 U2.39 ; 56.79,6.67 56.59,6.47 50.24,6.47 49.46,7.25 J11.3 ; 56.79,6.67 56.79,16.43 R34.2
  BOTTOM w0.203: J2.5 163.45,87.97 155.4,87.97 136.14,107.23 82.88,107.23 80.31,104.65 J29.4
CON_B_PIN_6: length 89.4
  TOP w0.203: J2.6 174.98,87.92 205.03,57.88 229.84,57.88 231.29,56.43 231.29,50.3 R6.2
  TOP w0.254: R6.2 229.52,48.42 U1.1
CON_B_PIN_11: length 92.7
  TOP w0.203: J2.11 141.12,80.3 141,80.18 C4.1
  BOTTOM w0.254: J12.1 141,11.81 C4.1
CON_B_PIN_14: length 51.4
  TOP w0.203: R2.1 208.63,56.63 204.95,56.63 183.82,77.76 J2.14
CON_B_PIN_17: length 68.7
  TOP w0.203: J2.17 157.2,72.68 156.99,72.48 156.99,18.25 C3.1
  BOTTOM w0.254: C3.1 157,11 J9.1
CON_B_PIN_18: length 7.8
  BOTTOM w0.254: J18.1 97,10.93 C8.1
CON_B_PIN_19: length 79.5
  TOP w0.203: J2.19 157.76,70.14 157.55,69.94 157.55,25.82 157.76,25.62 171.22,25.62 171.88,24.96 171.88,18.36 C1.1
  BOTTOM w0.254: J3.1 172,11.18 C1.1
CON_B_PIN_21: length 112.1
  TOP w0.203: 7.14,55.62 6.91,55.85 6.91,78.46 7.11,78.66 ; 7.14,55.62 6.88,55.36 6.88,32.89 7.19,32.58 J16.4 ; 7.14,55.62 J13.4 ; 7.2,101.77 6.91,101.48 6.91,78.86 7.11,78.66 ; 7.2,101.77 7,101.97 7,124.54 7.2,124.74 J5.4 ; 7.2,101.77 10.93,101.77 J8.4 ; 7.11,78.66 J10.4
CON_B_PIN_34: length 5.5
  TOP w0.254: R4.2 225.22,40.98 226.67,42.43 229.43,42.43 U1.4
DBG_LED_1: length 20.1
  TOP w0.203: R16.1 34.99,131.42 35.33,131.08 39.98,131.08 40.18,131.28 40.18,135.37 40.87,136.06 49.32,136.06 U2.3
DBG_LED_2: length 29.9
  TOP w0.203: R17.1 26.24,130.11 26.44,129.91 40.89,129.91 41.22,130.24 41.22,134.25 41.43,134.46 49.32,134.46 U2.4
ENCODER_A: length 131.1
  TOP w0.203: C7.1 59.44,46.68 59.44,103.57 54.8,108.21 U2.26
  BOTTOM w0.254: C7.1 33,13.66 J20.1
ENCODER_B: length 144.8
  TOP w0.203: C9.1 22,114.37 25.1,117.46 46.43,117.46 46.63,117.67 46.63,122.26 50,125.63 U2.16
  BOTTOM w0.254: C9.1 22,19.66 J20.2
FGND: length 181.9
  TOP w0.254: C26.2 228.47,126.42 C25.2 240.18,122.24 C31.2 ; C31.2 240.28,126.22 240.31,126.25 C32.2 240.31,130.99 241,131.69 C33.2 240.78,132.96 221.59,132.96 221.34,132.7 221.34,122.9 220.28,121.84 FL1.2 ; C31.2 240.28,115.4 230.17,105.3 230.17,98.92 230.43,98.67 259.75,98.67 260,98.92 J19.2 260.06,105.24 263.75,105.24 264,105.49 264,118.16 263.75,118.41 R19.1 R20.1 R21.1 R22.1 R23.1
  TOP w0.635: D9.1 257.93,103.24 J19.2
NRESET: length 9.5
  TOP w0.254: C21.1 63.94,130.89 v1(62.59,130.89) ; U2.40 v1(56.14,130.89)
  BOTTOM w0.254: v1(56.14,130.89) v1(62.59,130.89)
RELAY1_1: length 34.1
  BOTTOM w0.254: K1.5 182,16.37 J4.1
RELAY1_2: length 20.1
  BOTTOM w0.254: J4.2 176,17.29 K1.2
RELAY2_1: length 31.7
  BOTTOM w0.254: J6.1 203,10.6 K2.5
RELAY2_2: length 17.7
  BOTTOM w0.254: J6.2 197,11.48 K2.2
SWCLK: length 12.2
  TOP w0.254: U2.53 70.76,136.89 J24.2
SWDIO: length 12.9
  TOP w0.254: U2.51 66.21,136.09 67.89,134.41 J24.3
UC_OSC_IN: length 10.3
  TOP w0.254: C22.2 48.67,117.75 Y1.2 48.69,120.56 48.69,123.33 50.8,125.44 U2.17
UC_OSC_OUT: length 9.4
  TOP w0.254: C23.2 51.59,117.74 Y1.1 51.6,120.55 U2.18
VDC_5V: length 63.6
  TOP w0.203: J31.1 234.21,138.24 242.31,138.24
  TOP w0.254: C31.1 243.28,127.85 C32.1 243.23,131.02 242.56,131.69 C33.1 242.56,137.99 242.31,138.24
  TOP w0.635: J19.1 258.14,112.24 D8.1 249,115.87 243.28,121.59 C31.1
  BOTTOM w0.203: J30.1 72.69,78.67 J29.1
N8883662: length 33.9
  TOP w0.203: D5.1 53.98,93.22 R14.1 53.97,99.96 LS1.M 52.74,105.75 47.02,105.75 43.5,102.24 Q3.3
N8883700: length 16.8
  TOP w0.203: D5.2 51.94,92.49 R14.2 52.66,93.23 R13.1 48.51,101 LS1.P
N9062725: length 4.9
  TOP w0.254: L1.1 57.2,122.39 U2.31
N9076286: length 18.9
  TOP w0.254: L2.2 D9.2 D8.2
N9076290: length 56.6
  TOP w0.254: C25.1 225.35,122.44 C26.1 ; C25.1 225.55,122.24 L2.1 ; C25.1 218.64,115.33 209.83,115.33 209.4,115.76 FL1.1 203.26,121.84 R18.1
N9076304: length 38.7
  TOP w0.254: D10.2 201.35,105.6 C24.1 201.35,115.11 C27.1 200.41,116.05 R18.2 200.46,121.83 200.46,126.74 200.71,126.99 202.51,126.99 203.01,127.48 F1.1 208.8,133.24 FL1.4
N9079599: length 15.2
  TOP w0.254: U3.7 U3.8 224.4,86.15 225,86.74 227.8,86.74 R25.1 230.7,86.54 C30.1 231,83.37 FB1.1
N9079749: length 13.6
  TOP w0.254: U3.3 208.13,83.61 R24.2
N9079753: length 8.9
  TOP w0.254: R25.2 R28.1 227.86,83.61 U3.6
N9079813: length 12.7
  TOP w0.254: U3.4 205.96,82.34 R26.2
N9092651: length 55.9
  TOP w0.203: D1.1 187.95,51.03 Q1.3 187.96,40.28 K1.4 191.51,40.24 191.71,40.04 191.71,15.25 191.51,15.05 D12.2
N9092718: length 3.6
  TOP w0.203: R1.2 188.93,52.99 Q1.1
N9093131: length 54.2
  TOP w0.203: D13.2 206.25,15.05 206.45,15.25 206.45,39.94 206.65,40.15 208.91,40.15 K2.4 208.99,40.25 Q2.3 208.96,51.03 D2.1
N9093215: length 3.6
  TOP w0.203: Q2.1 209.96,53.04 R2.2
N9096482: length 5.4
  TOP w0.254: R7.2 225.45,46.14 226.69,44.9 229.5,44.9 U1.2
N9096486: length 4.8
  TOP w0.254: U1.3 229.5,43.63 R5.2
N9096991: length 5.4
  TOP w0.254: R8.2 238.96,43.61 U1.6
N9096995: length 8.1
  TOP w0.254: U1.7 236.53,44.88 236.96,45.3 236.96,47.92 237.39,48.35 239.49,48.35 R10.2
N9098499: length 25.1
  TOP w0.254: J23.S2 259.21,83.24 253.5,83.24 252.9,82.64 J23.S1 ; J23.S3 253.04,75.7 252.9,75.84 J23.S1 ; J23.S1 252.84,79.24 R11.2
N9104799: length 25.2
  TOP w0.254: J25.S1 252.86,62.24 R29.2 ; J25.S1 252.9,58.59 253.15,58.34 259.21,58.34 J25.S3 ; J25.S1 252.9,65.64 253.14,65.88 J25.S2
N9105165: length 25.6
  TOP w0.254: J26.S1 252.9,41.59 253.15,41.34 259.23,41.34 J26.S3 ; J26.S1 252.9,48.89 253.15,49.14 259.27,49.14 J26.S2 ; J26.S1 252.88,45.24 R30.2
N9105269: length 25.6
  TOP w0.254: J27.S2 259.25,32.14 253.15,32.14 252.9,31.89 J27.S1 ; J27.S1 252.9,24.59 253.15,24.34 259.25,24.34 J27.S3 ; J27.S1 R31.2
N9107937: length 2.7
  TOP w0.203: D12.1 185.23,16.53 R32.2
N9108044: length 2.7
  TOP w0.203: R33.2 200.43,16.55 D13.1
N90510690: length 4.4
  TOP w0.203: R15.2 35.97,103.24 Q3.1
N90714391: length 2.6
  TOP w0.254: R16.2 35,133.9 D6.1
N90750741: length 2.6
  TOP w0.254: D7.1 R17.2
N90797911: length 2.1
  TOP w0.254: R27.2 D11.1

## Copper pours and planes (outline as drawn; the poured copper is in the pictures)
GND on TOP, BOTTOM: 8.08,3.08 264.62,3.08 269.7,8.16 269.7,135.16 264.62,140.24 8.08,140.24 3,135.16 3,8.16
